# EAGLE board ZED-F9P_NEO-D9S_Combo-Panel (EAGLE 9.6.2), part 1 of 3
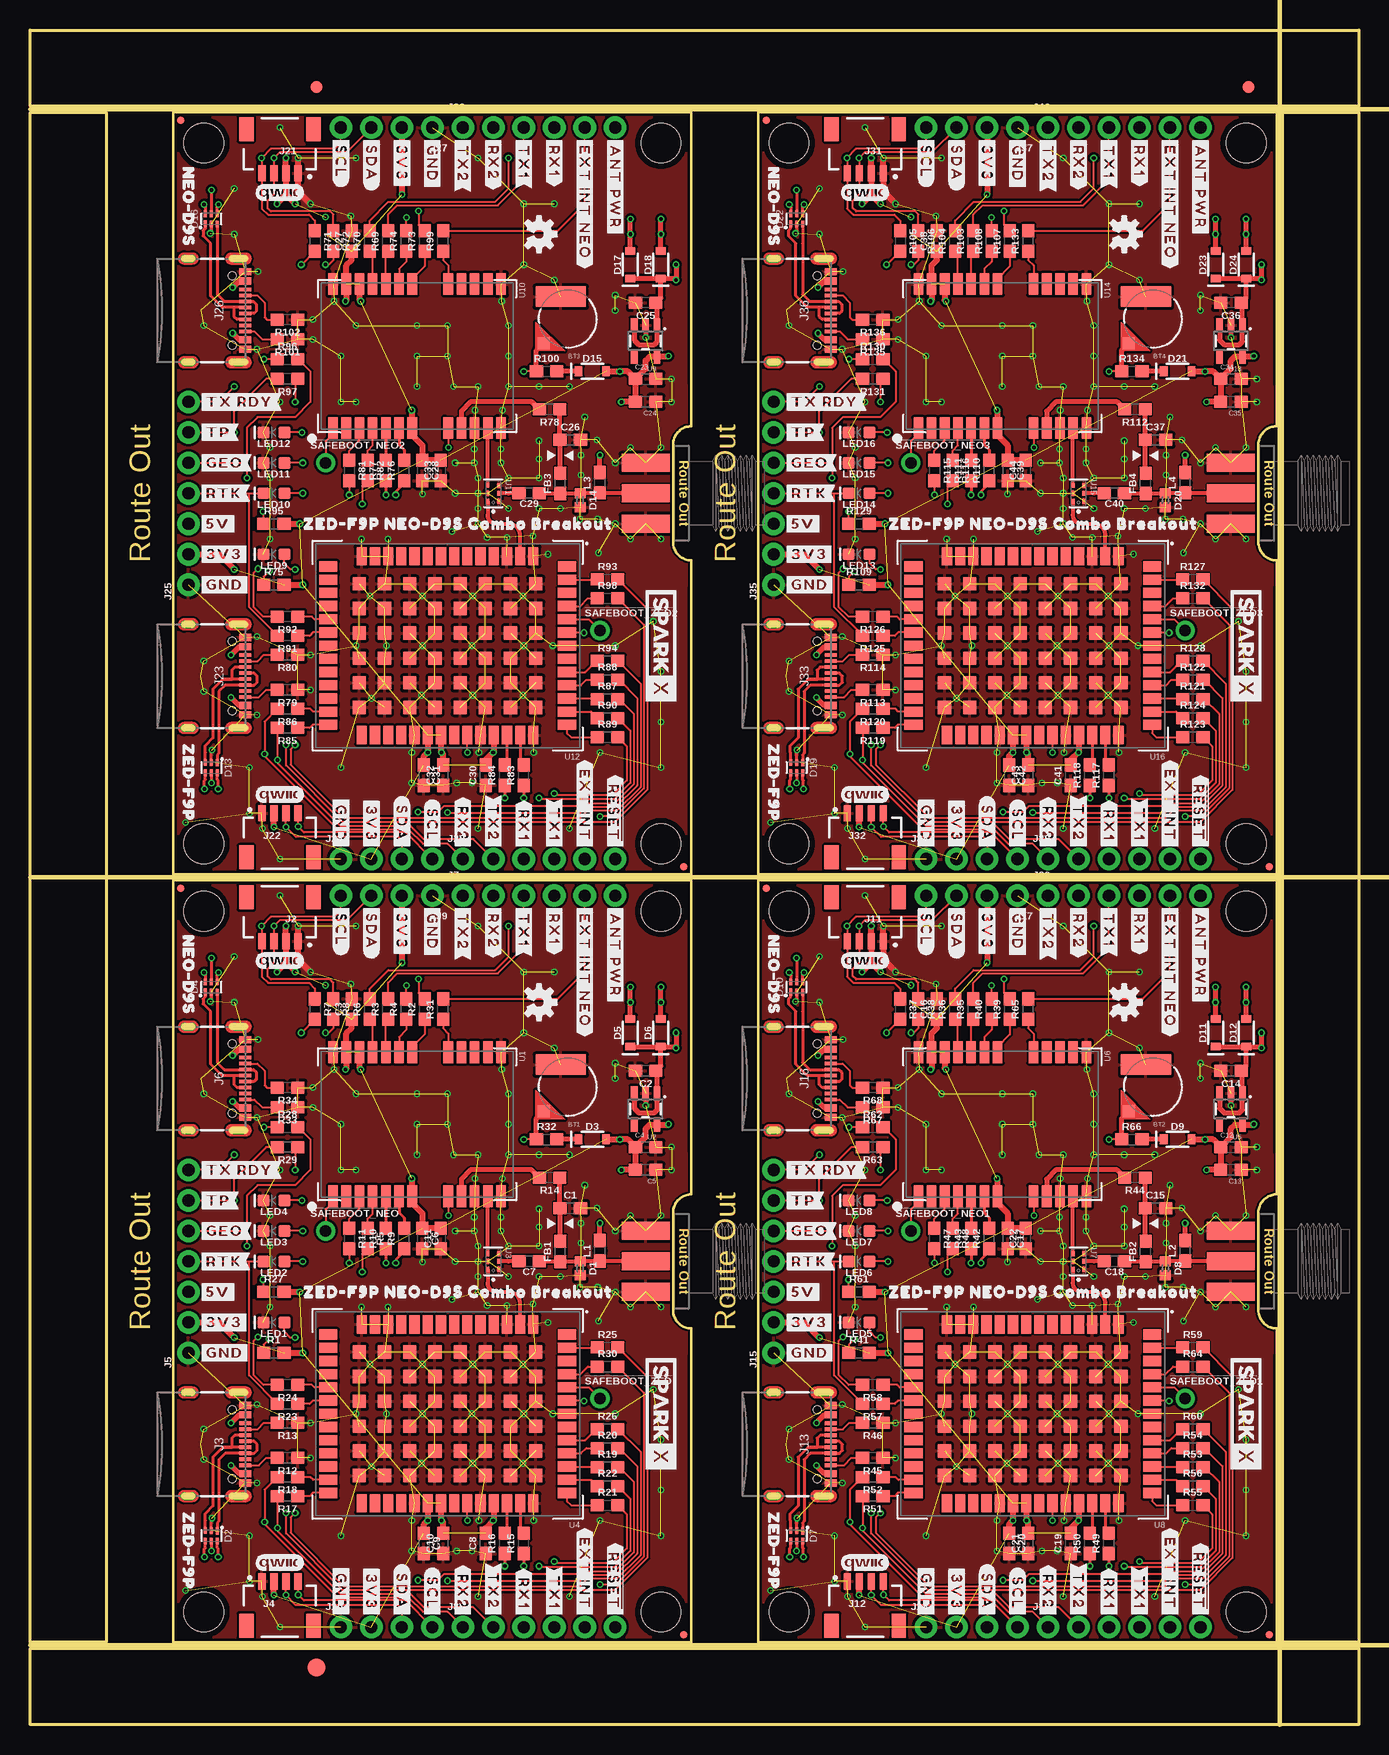
[diagram p0: board, top side]
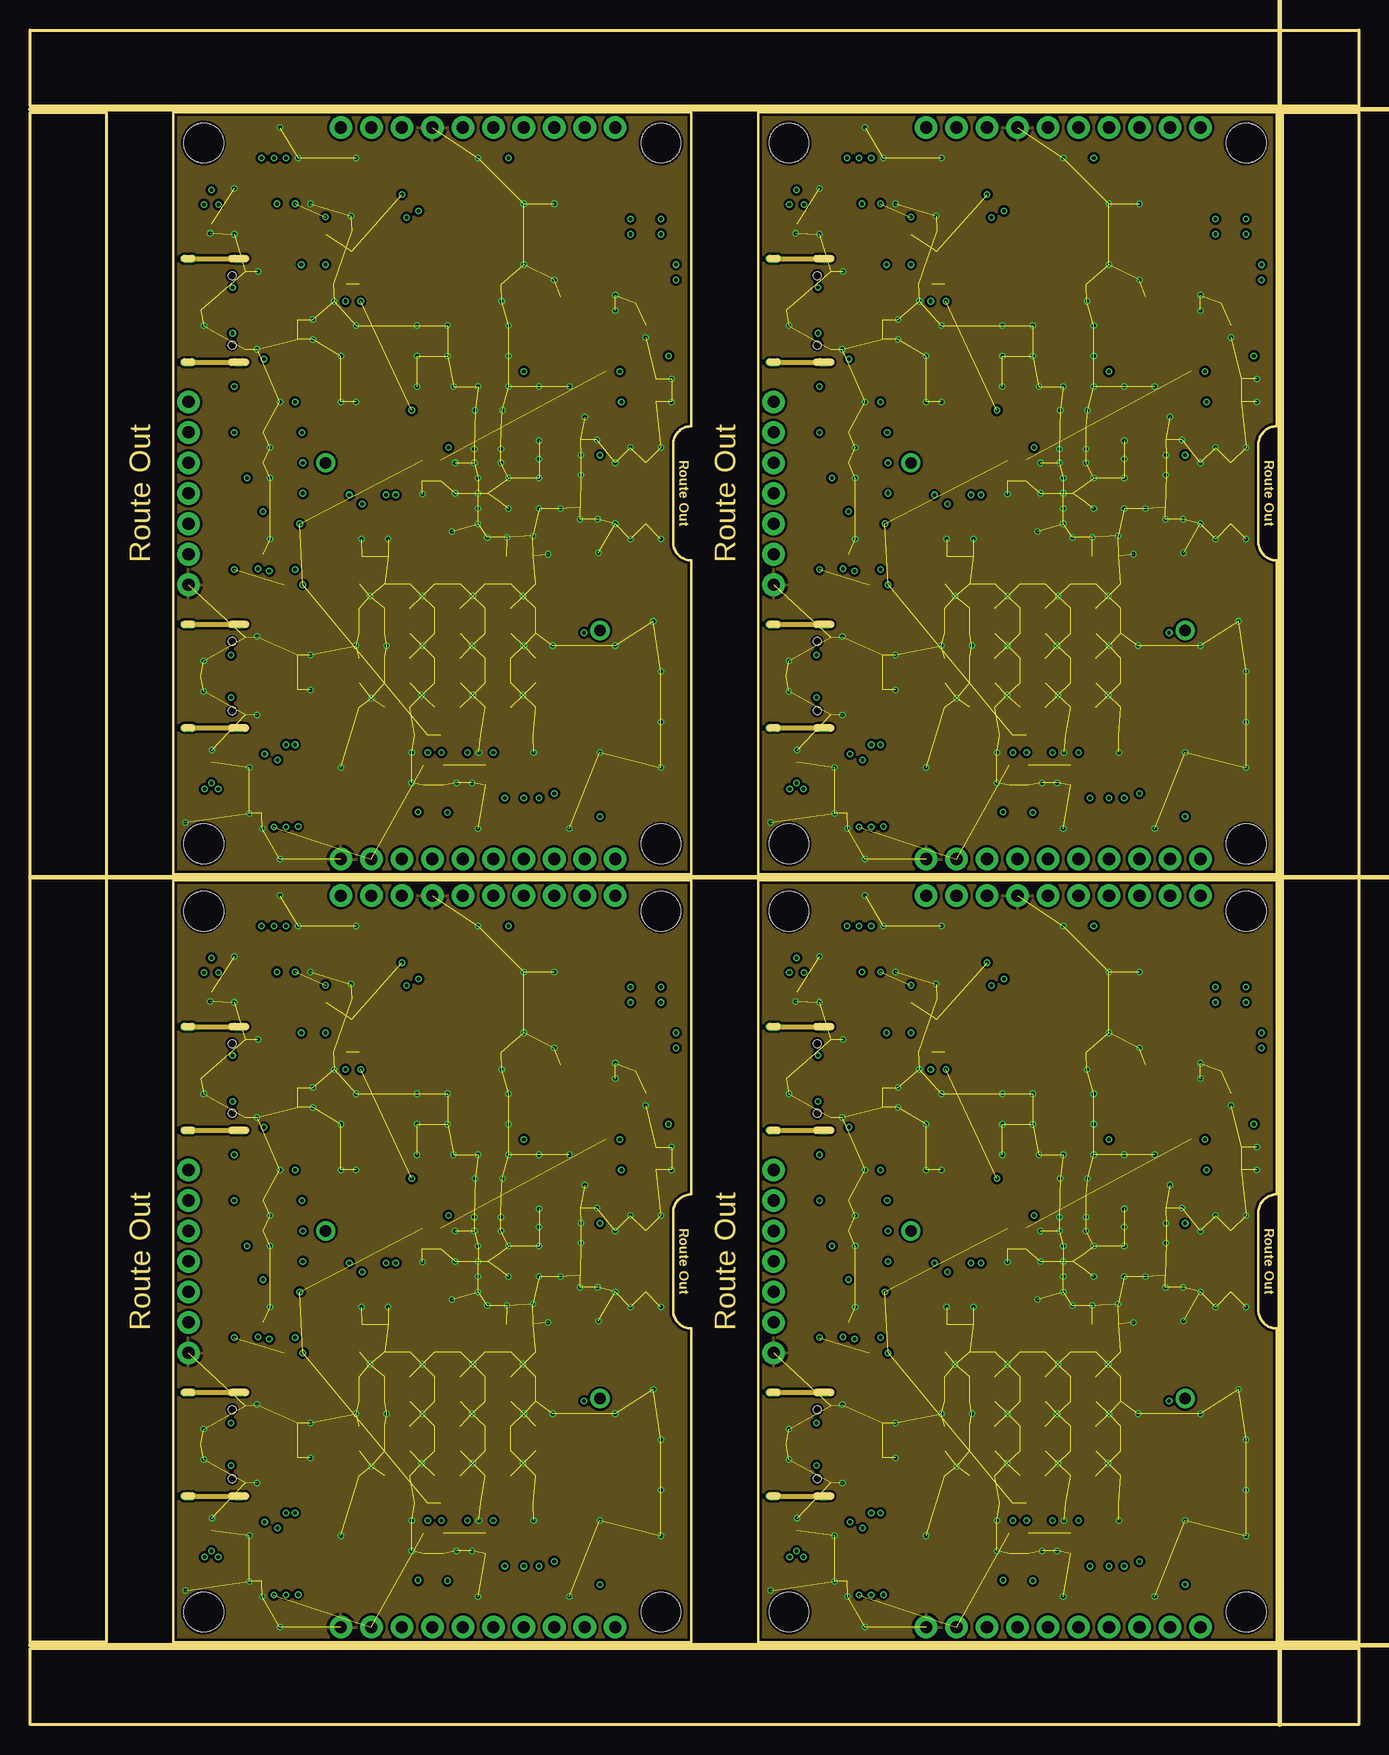
[diagram p1: board, inner layer Route2]
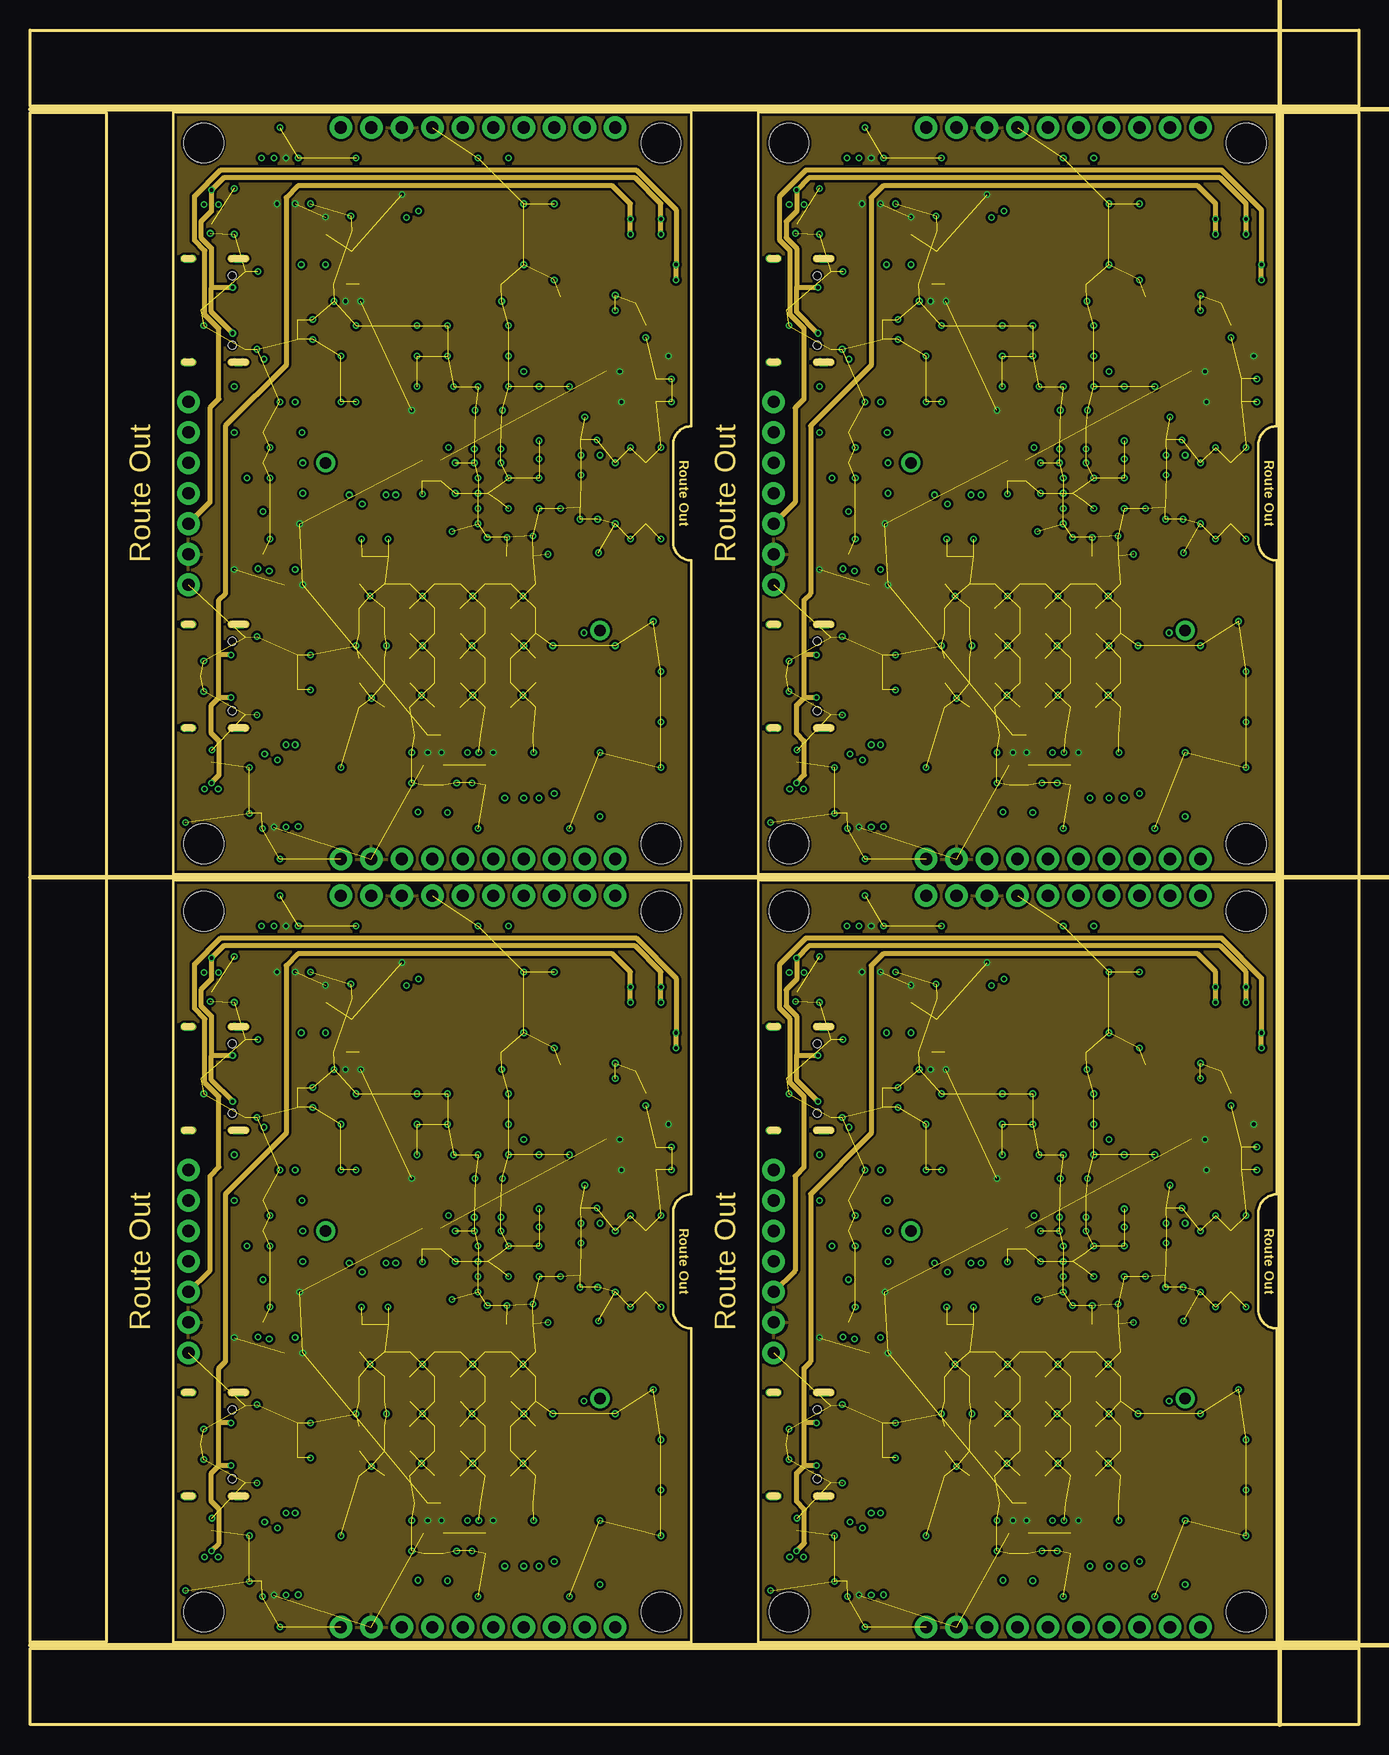
[diagram p2: board, inner layer Route15]
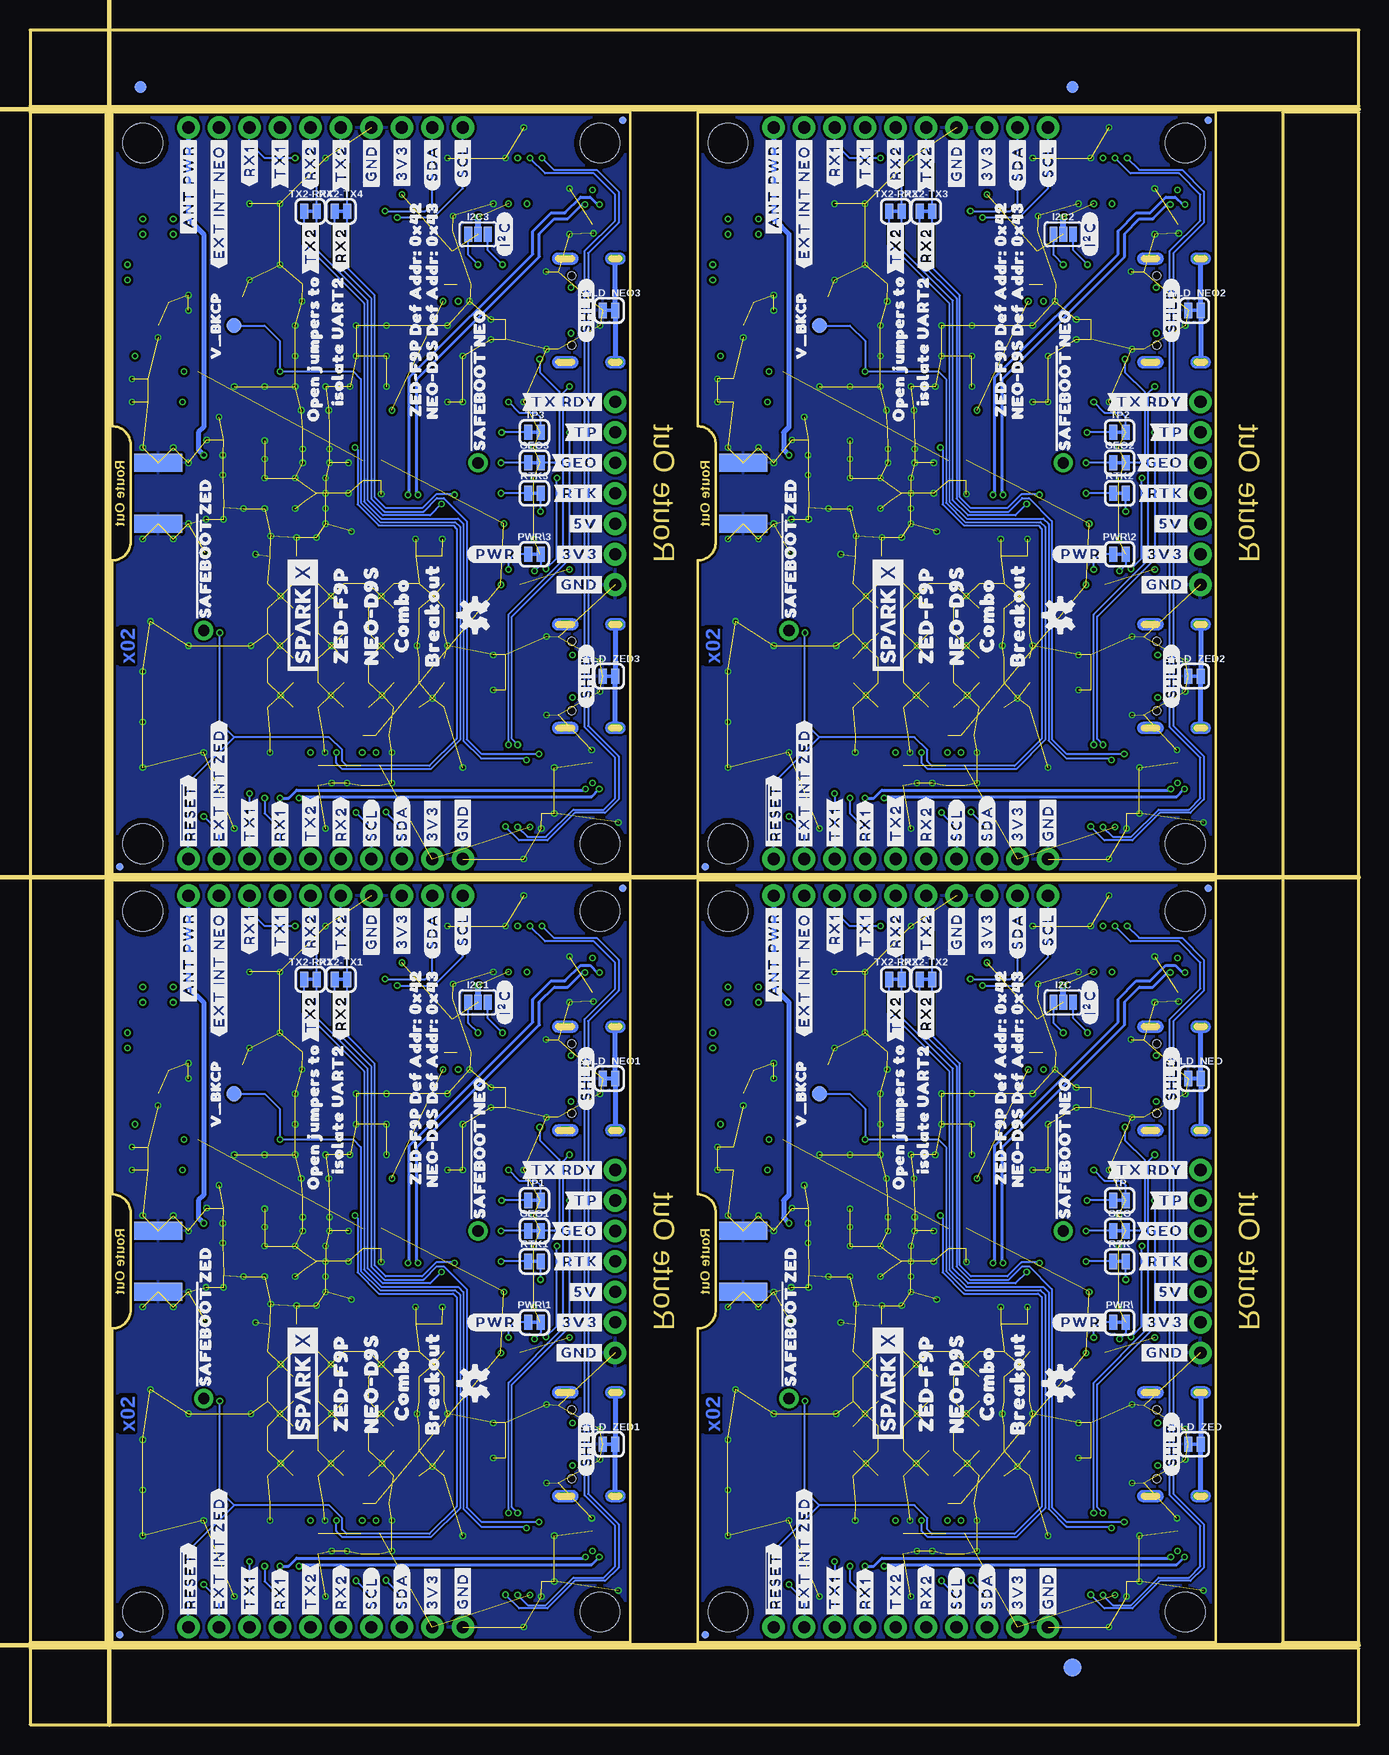
[diagram p3: board, bottom side, seen from below]

Size 110.74 x 141.22 mm. Coordinates in mm from the lower left corner, seen from the top.
Outline: 11.94,6.86 11.94,70.36 55.12,70.36 55.12,44.2 arc90 53.59,42.67 53.59,34.54 arc90 55.12,33.02 55.12,6.86 11.94,6.86
Outline: 60.71,6.86 60.71,70.36 103.89,70.36 103.89,44.2 arc90 102.36,42.67 102.36,34.54 arc90 103.89,33.02 103.89,6.86 60.71,6.86
Outline: 11.94,70.87 11.94,134.37 55.12,134.37 55.12,108.2 arc90 53.59,106.68 53.59,98.55 arc90 55.12,97.03 55.12,70.87 11.94,70.87
Outline: 60.71,70.87 60.71,134.37 103.89,134.37 103.89,108.2 arc90 102.36,106.68 102.36,98.55 arc90 103.89,97.03 103.89,70.87 60.71,70.87
Outline: 0,6.35 110.74,6.35 110.74,0 0,0 0,6.35
Outline: 104.39,134.37 110.74,134.37 110.74,6.86 104.39,6.86 104.39,134.37
Outline: 0,141.22 110.74,141.22 110.74,134.87 0,134.87 0,141.22
Outline: 0,134.37 6.35,134.37 6.35,6.86 0,6.86 0,134.37
Copper layers (1*2*15*16): Top 0.035559375mm / dielectric 0.47751875mm / Route2 0.035559375mm / dielectric 0.47751875mm / Route15 0.035559375mm / dielectric 0.47751875mm / Bottom 0.035559375mm
Design rules "ZED-F9P_NEO-D9S_Combo": minimum track width 5mil, minimum drill 0.2mm, track to track 5mil, track to pad 5mil, pad to pad 5mil, via to via 5mil, smd to smd 5mil, copper to edge 7mil, drill to drill 7mil, minimum pad ring 5mil, minimum via ring 5mil, stop-mask expansion 2.5mil, vias tented up to drill 25mil, thermal gap 10mil
Net classes: 2 3.3V: width 0.508 mm
tRestrict: 16 lines
Milling: 4 lines

## Footprints (pad centres in the part's own frame; a part is rotated, then mirrored left to right if it is on the bottom)
1X01_NO_SILK = drill 0.95 pad 1.6: 1 0,0
MS421R_IV03E = smd 1 x 1: + 2.022,2.032 | smd 4.2 x 1.7: - 0.6,-1.85
0603 = smd 1.1 x 1: 1 -0.85,0; 2 0.85,0
0402 = smd 0.85 x 0.9: 1 -0.58,0; 2 0.58,0
SOT886 = smd 0.61 x 0.25: 1 -0.405,0.5 | smd 0.56 x 0.25: 2 -0.43,0; 3 -0.43,-0.5; 4 0.43,-0.5; 5 0.43,0; 6 0.43,0.5
SOD-323 = smd 0.63 x 0.83: A 1.15,0; C -1.15,0
FIDUCIAL-1X2 = smd 1 x 1: 1 0,0
FIDUCIAL-1.5X3 = smd 1.5 x 1.5: 1 0,0
SMT-JUMPER_2_NC_TRACE_SILK = smd 0.66 x 1.27: 1 -0.521,0; 2 0.521,0
SMT-JUMPER_3_NO_SILK = smd 0.635 x 1.27: 1 -0.813,0; 2 0,0; 3 0.813,0
SMA-EDGE = smd 1.5 x 4: GND@0 -2.54,0; GND@1 2.54,0; SIG 0,0 | smd 1.5 x 4 bottom: GND@2 -2.54,0; GND@3 2.54,0
JST04_1MM_RA = smd 0.6 x 1.35: 1 -1.5,0; 2 -0.5,0; 3 0.5,0; 4 1.5,0 | smd 1.2 x 2: NC1 2.8,-3.675; NC2 -2.8,-3.675
USB-C-16P_4LAYER-PADS = smd 0.3 x 1: A5 -1.25,-0.34; A6 -0.25,-0.34; A7 0.25,-0.34; A8 1.25,-0.34; B5 1.75,-0.34; B6 0.75,-0.34; B7 -0.75,-0.34; B8 -1.75,-0.34 | smd 0.6 x 1: GND -3.225,-0.34; GND2 3.225,-0.34; VBUS1 -2.45,-0.34; VBUS2 2.45,-0.34 | drill 0.4 pad 0.6 long: SHLD1 -4.318,-0.915; SHLD2 4.318,-0.915; SHLD3 -4.318,-5.095; SHLD4 4.318,-5.095 | hole 0.65: -2.89,-1.445; 2.89,-1.445
1X07_NO_SILK = drill 1.016 pad 1.88: 1 0,0; 2 2.54,0; 3 5.08,0; 4 7.62,0; 5 10.16,0; 6 12.7,0; 7 15.24,0
1X06_NO_SILK = drill 1.016 pad 1.88: 1 0,0; 2 2.54,0; 3 5.08,0; 4 7.62,0; 5 10.16,0; 6 12.7,0
1X04_NO_SILK = drill 1.016 pad 1.88: 1 0,0; 2 2.54,0; 3 5.08,0; 4 7.62,0
STAND-OFF = hole 3.302: 0,0
MICRO-FIDUCIAL = smd 0.635 x 0.635: 1 0,0
0603_NO-CREAM = smd 1.1 x 1: 1 -0.85,0; 2 0.85,0
LED-0603 = smd 1 x 1: A -0.877,0; C 0.877,0
NEO-M9N/M8T/M8U/D9S = smd 1.8 x 0.8: 1 6,-7; 2 6,-5.9; 3 6,-4.8; 4 6,-3.7; 5 6,-2.6; 6 6,-1.5; 7 6,-0.4; 8 6,2.6; 9 6,3.7; 10 6,4.8; 11 6,5.9; 12 6,7; 13 -6,7; 14 -6,5.9; 15 -6,4.8; 16 -6,3.7; 17 -6,2.6; 18 -6,-0.4; 19 -6,-1.5; 20 -6,-2.6; 21 -6,-3.7; 22 -6,-4.8; 23 -6,-5.9; 24 -6,-7
SOT23-5 = smd 0.55 x 1.2: 1 -0.95,-1.3; 2 0,-1.3; 3 0.95,-1.3; 4 0.95,1.3; 5 -0.95,1.3
PD0922J5050S2HF_ANA = smd 0.41 x 0.33: 1 0.65,0.483; 2 0,0.483; 3 -0.65,0.483; 4 -0.65,-0.483; 5 0,-0.483; 6 0.65,-0.483
ZED-F9P = smd 0.85 x 1.52: 1 -7.15,-7.45; 2 -6.05,-7.45; 3 -4.95,-7.45; 4 -3.85,-7.45; 5 -2.75,-7.45; 6 -1.65,-7.45; 7 -0.55,-7.45; 8 0.55,-7.45; 9 1.65,-7.45; 10 2.75,-7.45; 11 3.85,-7.45; 12 4.95,-7.45; 13 6.05,-7.45; 14 7.15,-7.45; 28 7.15,7.45; 29 6.05,7.45; 30 4.95,7.45; 31 3.85,7.45; 32 2.75,7.45; 33 1.65,7.45; 34 0.55,7.45; 35 -0.55,7.45; 36 -1.65,7.45; 37 -2.75,7.45; 38 -3.85,7.45; 39 -4.95,7.45; 40 -6.05,7.45; 41 -7.15,7.45 | smd 1.52 x 0.85: 15 9.95,-6.6; 16 9.95,-5.5; 17 9.95,-4.4; 18 9.95,-3.3; 19 9.95,-2.2; 20 9.95,-1.1; 21 9.95,0; 22 9.95,1.1; 23 9.95,2.2; 24 9.95,3.3; 25 9.95,4.4; 26 9.95,5.5; 27 9.95,6.6; 42 -9.95,6.6; 43 -9.95,5.5; 44 -9.95,4.4; 45 -9.95,3.3; 46 -9.95,2.2; 47 -9.95,1.1; 48 -9.95,0; 49 -9.95,-1.1; 50 -9.95,-2.2; 51 -9.95,-3.3; 52 -9.95,-4.4; 53 -9.95,-5.5; 54 -9.95,-6.6 | smd 1.1 x 1.1: 55 -1.05,-1.05; 56 -3.15,-1.05; 57 -5.25,-1.05; 58 -7.35,-1.05; 59 -1.05,-3.1; 60 -3.15,-3.1; 61 -5.25,-3.1; 62 -7.35,-3.1; 63 -1.05,-5.15; 64 -3.15,-5.15; 65 -5.25,-5.15; 66 -7.35,-5.15; 67 -1.05,5.15; 68 -3.15,5.15; 69 -5.25,5.15; 70 -7.35,5.15; 71 -1.05,3.1; 72 -3.15,3.1; 73 -5.25,3.1; 74 -7.35,3.1; 75 -1.05,1.05; 76 -3.15,1.05; 77 -5.25,1.05; 78 -7.35,1.05; 79 1.05,1.05; 80 3.15,1.05; 81 5.25,1.05; 82 7.35,1.05; 83 1.05,3.1; 84 3.15,3.1; 85 5.25,3.1; 86 7.35,3.1; 87 1.05,5.15; 88 3.15,5.15; 89 5.25,5.15; 90 7.35,5.15; 91 1.05,-5.15; 92 3.15,-5.15; 93 5.25,-5.15; 94 7.35,-5.15; 95 1.05,-3.1; 96 3.15,-3.1; 97 5.25,-3.1; 98 7.35,-3.1; 99 1.05,-1.05; 100 3.15,-1.05; 101 5.25,-1.05; 102 7.35,-1.05
PAD.03X.05 = smd 1.27 x 1.27: 1 0,0

## Placement (x,y rotation side)
!SAFEBOOT_NEO!  TEST-POINTPOGO_PTH  [1X01_NO_SILK]  24.64,41.15 0 top
!SAFEBOOT_NEO!1  TEST-POINTPOGO_PTH  [1X01_NO_SILK]  73.41,41.15 0 top
!SAFEBOOT_NEO!2  TEST-POINTPOGO_PTH  [1X01_NO_SILK]  24.64,105.16 0 top
!SAFEBOOT_NEO!3  TEST-POINTPOGO_PTH  [1X01_NO_SILK]  73.41,105.16 0 top
!SAFEBOOT_ZED!  TEST-POINTPOGO_PTH  [1X01_NO_SILK]  47.5,27.18 0 top
!SAFEBOOT_ZED!1  TEST-POINTPOGO_PTH  [1X01_NO_SILK]  96.27,27.18 0 top
!SAFEBOOT_ZED!2  TEST-POINTPOGO_PTH  [1X01_NO_SILK]  47.5,91.19 0 top
!SAFEBOOT_ZED!3  TEST-POINTPOGO_PTH  [1X01_NO_SILK]  96.27,91.19 0 top
BT1  RELOWABLE_BATTERY_MS421R  [MS421R_IV03E]  44.83,53.15 180 top
BT2  RELOWABLE_BATTERY_MS421R  [MS421R_IV03E]  93.6,53.15 180 top
BT3  RELOWABLE_BATTERY_MS421R  [MS421R_IV03E]  44.83,117.16 180 top
BT4  RELOWABLE_BATTERY_MS421R  [MS421R_IV03E]  93.6,117.16 180 top
C1  47pF  [0603]  45.02,43.05 0 top
C2  1.0uF  [0603]  51.31,54.48 180 top
C3  1.0uF  [0603]  26.8,59.63 90 top
C4  1.0uF  [0603]  51.31,48.13 0 top
C5  0.1uF  [0603]  51.31,46.23 180 top
C6  1.0uF  [0603]  32.7,40.51 270 top
C7  47pF  [0603]  41.59,38.61 180 top
C8  1.0uF  [0603]  37.97,15.11 90 top
C9  1.0uF  [0603]  32.83,15.11 270 top
C10  0.1uF  [0603]  34.42,15.11 90 top
C11  0.1uF  [0603]  34.23,40.51 90 top
C12  1.0uF  [0603]  100.08,48.13 0 top
C13  0.1uF  [0603]  100.08,46.23 180 top
C14  1.0uF  [0603]  100.08,54.48 180 top
C15  47pF  [0603]  93.79,43.05 0 top
C16  1.0uF  [0603]  75.56,59.63 90 top
C17  1.0uF  [0603]  81.47,40.51 270 top
C18  47pF  [0603]  90.36,38.61 180 top
C19  1.0uF  [0603]  86.74,15.11 90 top
C20  1.0uF  [0603]  81.6,15.11 270 top
C21  0.1uF  [0603]  83.19,15.11 90 top
C22  0.1uF  [0603]  82.99,40.51 90 top
C23  1.0uF  [0603]  51.31,112.14 0 top
C24  0.1uF  [0603]  51.31,110.24 180 top
C25  1.0uF  [0603]  51.31,118.49 180 top
C26  47pF  [0603]  45.02,107.06 0 top
C27  1.0uF  [0603]  26.8,123.63 90 top
C28  1.0uF  [0603]  32.7,104.52 270 top
C29  47pF  [0603]  41.59,102.62 180 top
C30  1.0uF  [0603]  37.97,79.12 90 top
C31  1.0uF  [0603]  32.83,79.12 270 top
C32  0.1uF  [0603]  34.42,79.12 90 top
C33  0.1uF  [0603]  34.23,104.52 90 top
C34  1.0uF  [0603]  100.08,112.14 0 top
C35  0.1uF  [0603]  100.08,110.24 180 top
C36  1.0uF  [0603]  100.08,118.49 180 top
C37  47pF  [0603]  93.79,107.06 0 top
C38  1.0uF  [0603]  75.56,123.63 90 top
C39  1.0uF  [0603]  81.47,104.52 270 top
C40  47pF  [0603]  90.36,102.62 180 top
C41  1.0uF  [0603]  86.74,79.12 90 top
C42  1.0uF  [0603]  81.6,79.12 270 top
C43  0.1uF  [0603]  83.19,79.12 90 top
C44  0.1uF  [0603]  82.99,104.52 90 top
D1  PESD0402-0402  [0402]  45.85,38.04 270 top
D2  PRTR5V0U2F  [SOT886]  15.11,15.75 270 top
D3  0.5A/40V/420mV  [SOD-323]  46.86,48.77 0 top
D4  PRTR5V0U2F  [SOT886]  15.11,61.47 90 top
D5  1A/23V/620mV  [SOD-323]  50.04,57.66 90 top
D6  1A/23V/620mV  [SOD-323]  52.58,57.66 90 top
D7  PRTR5V0U2F  [SOT886]  63.88,15.75 270 top
D8  PESD0402-0402  [0402]  94.62,38.04 270 top
D9  0.5A/40V/420mV  [SOD-323]  95.63,48.77 0 top
D10  PRTR5V0U2F  [SOT886]  63.88,61.47 90 top
D11  1A/23V/620mV  [SOD-323]  98.81,57.66 90 top
D12  1A/23V/620mV  [SOD-323]  101.35,57.66 90 top
D13  PRTR5V0U2F  [SOT886]  15.11,79.76 270 top
D14  PESD0402-0402  [0402]  45.85,102.04 270 top
D15  0.5A/40V/420mV  [SOD-323]  46.86,112.78 0 top
D16  PRTR5V0U2F  [SOT886]  15.11,125.48 90 top
D17  1A/23V/620mV  [SOD-323]  50.04,121.67 90 top
D18  1A/23V/620mV  [SOD-323]  52.58,121.67 90 top
D19  PRTR5V0U2F  [SOT886]  63.88,79.76 270 top
D20  PESD0402-0402  [0402]  94.62,102.04 270 top
D21  0.5A/40V/420mV  [SOD-323]  95.63,112.78 0 top
D22  PRTR5V0U2F  [SOT886]  63.88,125.48 90 top
D23  1A/23V/620mV  [SOD-323]  98.81,121.67 90 top
D24  1A/23V/620mV  [SOD-323]  101.35,121.67 90 top
E$1  [FIDUCIAL-1X2]  23.88,136.46 0 top
E$2  [FIDUCIAL-1X2]  23.88,136.46 0 bottom
E$3  [FIDUCIAL-1X2]  101.54,136.46 0 top
E$4  [FIDUCIAL-1X2]  101.54,136.46 0 bottom
E$5  [FIDUCIAL-1.5X3]  23.88,4.76 0 top
E$6  [FIDUCIAL-1.5X3]  23.88,4.76 0 bottom
FB1  30Ω/1.8A  [0603]  44.2,39.43 90 top
FB2  30Ω/1.8A  [0603]  92.96,39.43 90 top
FB3  30Ω/1.8A  [0603]  44.2,103.44 90 top
FB4  30Ω/1.8A  [0603]  92.96,103.44 90 top
GEO  JUMPER-SMT_2_NC_TRACE_SILK  [SMT-JUMPER_2_NC_TRACE_SILK]  19.94,41.15 0 bottom
GEO1  JUMPER-SMT_2_NC_TRACE_SILK  [SMT-JUMPER_2_NC_TRACE_SILK]  68.71,41.15 0 bottom
GEO2  JUMPER-SMT_2_NC_TRACE_SILK  [SMT-JUMPER_2_NC_TRACE_SILK]  19.94,105.16 0 bottom
GEO3  JUMPER-SMT_2_NC_TRACE_SILK  [SMT-JUMPER_2_NC_TRACE_SILK]  68.71,105.16 0 bottom
I2C  JUMPER-SMT_3_NO_SILK  [SMT-JUMPER_3_NO_SILK]  24.64,60.2 0 bottom
I2C1  JUMPER-SMT_3_NO_SILK  [SMT-JUMPER_3_NO_SILK]  73.41,60.2 0 bottom
I2C2  JUMPER-SMT_3_NO_SILK  [SMT-JUMPER_3_NO_SILK]  24.64,124.21 0 bottom
I2C3  JUMPER-SMT_3_NO_SILK  [SMT-JUMPER_3_NO_SILK]  73.41,124.21 0 bottom
J1  ANTENNA-SMA-GROUNDEDEDGE_SMA  [SMA-EDGE]  51.31,38.61 270 top
J2  Qwiic Right Angle  [JST04_1MM_RA]  20.83,65.28 180 top
J3  USB Female Type C Connector  [USB-C-16P_4LAYER-PADS]  18.29,23.37 270 top
J4  Qwiic Right Angle  [JST04_1MM_RA]  20.83,11.94 0 top
J5  [1X07_NO_SILK]  13.21,30.99 90 top
J6  USB Female Type C Connector  [USB-C-16P_4LAYER-PADS]  18.29,53.85 270 top
J7  [1X06_NO_SILK]  36.07,69.09 0 top
J8  [1X06_NO_SILK]  36.07,8.13 0 top
J9  [1X04_NO_SILK]  33.53,69.09 180 top
J10  [1X04_NO_SILK]  25.91,8.13 0 top
J11  Qwiic Right Angle  [JST04_1MM_RA]  69.6,65.28 180 top
J12  Qwiic Right Angle  [JST04_1MM_RA]  69.6,11.94 0 top
J13  USB Female Type C Connector  [USB-C-16P_4LAYER-PADS]  67.06,23.37 270 top
J14  ANTENNA-SMA-GROUNDEDEDGE_SMA  [SMA-EDGE]  100.08,38.61 270 top
J15  [1X07_NO_SILK]  61.98,30.99 90 top
J16  USB Female Type C Connector  [USB-C-16P_4LAYER-PADS]  67.06,53.85 270 top
J17  [1X04_NO_SILK]  82.3,69.09 180 top
J18  [1X04_NO_SILK]  74.68,8.13 0 top
J19  [1X06_NO_SILK]  84.84,8.13 0 top
J20  [1X06_NO_SILK]  84.84,69.09 0 top
J21  Qwiic Right Angle  [JST04_1MM_RA]  20.83,129.29 180 top
J22  Qwiic Right Angle  [JST04_1MM_RA]  20.83,75.95 0 top
J23  USB Female Type C Connector  [USB-C-16P_4LAYER-PADS]  18.29,87.38 270 top
J24  ANTENNA-SMA-GROUNDEDEDGE_SMA  [SMA-EDGE]  51.31,102.62 270 top
J25  [1X07_NO_SILK]  13.21,95 90 top
J26  USB Female Type C Connector  [USB-C-16P_4LAYER-PADS]  18.29,117.86 270 top
J27  [1X04_NO_SILK]  33.53,133.1 180 top
J28  [1X04_NO_SILK]  25.91,72.14 0 top
J29  [1X06_NO_SILK]  36.07,72.14 0 top
J30  [1X06_NO_SILK]  36.07,133.1 0 top
J31  Qwiic Right Angle  [JST04_1MM_RA]  69.6,129.29 180 top
J32  Qwiic Right Angle  [JST04_1MM_RA]  69.6,75.95 0 top
J33  USB Female Type C Connector  [USB-C-16P_4LAYER-PADS]  67.06,87.38 270 top
J34  ANTENNA-SMA-GROUNDEDEDGE_SMA  [SMA-EDGE]  100.08,102.62 270 top
J35  [1X07_NO_SILK]  61.98,95 90 top
J36  USB Female Type C Connector  [USB-C-16P_4LAYER-PADS]  67.06,117.86 270 top
J37  [1X04_NO_SILK]  82.3,133.1 180 top
J38  [1X04_NO_SILK]  74.68,72.14 0 top
J39  [1X06_NO_SILK]  84.84,72.14 0 top
J40  [1X06_NO_SILK]  84.84,133.1 0 top
JP1  STAND-OFF  [STAND-OFF]  63.25,67.79 0 top
JP2  STAND-OFF  [STAND-OFF]  101.35,67.79 0 top
JP3  FIDUCIALUFIDUCIAL  [MICRO-FIDUCIAL]  103.25,7.49 0 top
JP4  FIDUCIALUFIDUCIAL  [MICRO-FIDUCIAL]  61.34,69.7 0 top
JP5  FIDUCIALUFIDUCIAL  [MICRO-FIDUCIAL]  103.25,7.49 0 bottom
JP6  FIDUCIALUFIDUCIAL  [MICRO-FIDUCIAL]  61.34,69.7 0 bottom
JP7  STAND-OFF  [STAND-OFF]  63.25,9.4 0 top
JP8  STAND-OFF  [STAND-OFF]  101.35,9.4 0 top
JP9  STAND-OFF  [STAND-OFF]  14.48,131.8 0 top
JP10  STAND-OFF  [STAND-OFF]  52.58,131.8 0 top
JP11  FIDUCIALUFIDUCIAL  [MICRO-FIDUCIAL]  54.48,71.5 0 top
JP12  FIDUCIALUFIDUCIAL  [MICRO-FIDUCIAL]  12.57,133.71 0 top
JP13  FIDUCIALUFIDUCIAL  [MICRO-FIDUCIAL]  54.48,71.5 0 bottom
JP14  FIDUCIALUFIDUCIAL  [MICRO-FIDUCIAL]  12.57,133.71 0 bottom
JP15  STAND-OFF  [STAND-OFF]  14.48,73.41 0 top
JP16  STAND-OFF  [STAND-OFF]  52.58,73.41 0 top
JP17  STAND-OFF  [STAND-OFF]  63.25,131.8 0 top
JP18  STAND-OFF  [STAND-OFF]  101.35,131.8 0 top
JP19  FIDUCIALUFIDUCIAL  [MICRO-FIDUCIAL]  103.25,71.5 0 top
JP20  FIDUCIALUFIDUCIAL  [MICRO-FIDUCIAL]  61.34,133.71 0 top
JP21  FIDUCIALUFIDUCIAL  [MICRO-FIDUCIAL]  54.48,7.49 0 top
JP22  FIDUCIALUFIDUCIAL  [MICRO-FIDUCIAL]  103.25,71.5 0 bottom
JP23  FIDUCIALUFIDUCIAL  [MICRO-FIDUCIAL]  61.34,133.71 0 bottom
JP24  STAND-OFF  [STAND-OFF]  63.25,73.41 0 top
JP25  STAND-OFF  [STAND-OFF]  101.35,73.41 0 top
JP31  STAND-OFF  [STAND-OFF]  14.48,67.79 0 top
JP41  STAND-OFF  [STAND-OFF]  52.58,67.79 0 top
JP61  FIDUCIALUFIDUCIAL  [MICRO-FIDUCIAL]  12.57,69.7 0 top
JP71  FIDUCIALUFIDUCIAL  [MICRO-FIDUCIAL]  54.48,7.49 0 bottom
JP81  FIDUCIALUFIDUCIAL  [MICRO-FIDUCIAL]  12.57,69.7 0 bottom
JP91  STAND-OFF  [STAND-OFF]  14.48,9.4 0 top
JP101  STAND-OFF  [STAND-OFF]  52.58,9.4 0 top
L1  DNP  [0603_NO-CREAM]  47.5,39.5 90 top
L2  DNP  [0603_NO-CREAM]  96.27,39.5 90 top
L3  DNP  [0603_NO-CREAM]  47.5,103.51 90 top
L4  DNP  [0603_NO-CREAM]  96.27,103.51 90 top
LED1  RED  [LED-0603]  20.32,33.53 180 top
LED2  BLUE  [LED-0603]  20.32,38.61 180 top
LED3  BLUE  [LED-0603]  20.32,41.15 180 top
LED4  BLUE  [LED-0603]  20.32,43.69 180 top
LED5  RED  [LED-0603]  69.09,33.53 180 top
LED6  BLUE  [LED-0603]  69.09,38.61 180 top
LED7  BLUE  [LED-0603]  69.09,41.15 180 top
LED8  BLUE  [LED-0603]  69.09,43.69 180 top
LED9  RED  [LED-0603]  20.32,97.54 180 top
LED10  BLUE  [LED-0603]  20.32,102.62 180 top
LED11  BLUE  [LED-0603]  20.32,105.16 180 top
LED12  BLUE  [LED-0603]  20.32,107.7 180 top
LED13  RED  [LED-0603]  69.09,97.54 180 top
LED14  BLUE  [LED-0603]  69.09,102.62 180 top
LED15  BLUE  [LED-0603]  69.09,105.16 180 top
LED16  BLUE  [LED-0603]  69.09,107.7 180 top
LOGO1  OSHW-LOGOS  [OSHW-LOGO-S]  42.42,60.2 270 top
LOGO2  OSHW-LOGOS  [OSHW-LOGO-S]  73.66,28.45 90 bottom
LOGO3  OSHW-LOGOS  [OSHW-LOGO-S]  91.19,60.2 270 top
LOGO4  OSHW-LOGOS  [OSHW-LOGO-S]  24.89,28.45 90 bottom
LOGO5  OSHW-LOGOS  [OSHW-LOGO-S]  24.89,92.46 90 bottom
LOGO6  OSHW-LOGOS  [OSHW-LOGO-S]  42.42,124.21 270 top
LOGO7  OSHW-LOGOS  [OSHW-LOGO-S]  73.66,92.46 90 bottom
LOGO8  OSHW-LOGOS  [OSHW-LOGO-S]  91.19,124.21 270 top
PWR\  JUMPER-SMT_2_NC_TRACE_SILK  [SMT-JUMPER_2_NC_TRACE_SILK]  19.94,33.53 0 bottom
PWR\1  JUMPER-SMT_2_NC_TRACE_SILK  [SMT-JUMPER_2_NC_TRACE_SILK]  68.71,33.53 0 bottom
PWR\2  JUMPER-SMT_2_NC_TRACE_SILK  [SMT-JUMPER_2_NC_TRACE_SILK]  19.94,97.54 0 bottom
PWR\3  JUMPER-SMT_2_NC_TRACE_SILK  [SMT-JUMPER_2_NC_TRACE_SILK]  68.71,97.54 0 bottom
R1  1k  [0603]  20.32,30.99 0 top
R2  33  [0603]  32.89,59.63 90 top
R3  33  [0603]  29.84,59.63 90 top
R4  33  [0603]  31.37,59.63 90 top
R5  33  [0603]  28.13,40.51 270 top
R6  33  [0603]  28.32,59.63 90 top
R7  2.2k  [0603]  23.75,59.63 270 top
R8  2.2k  [0603]  25.27,59.63 270 top
R9  27  [0603]  31.18,40.51 90 top
R10  27  [0603]  29.65,40.51 90 top
R11  33  [0603]  26.61,40.51 270 top
R12  5.1k  [0603]  21.46,22.23 180 top
R13  5.1k  [0603]  21.46,25.15 180 top
R14  10  [0603]  43.31,45.59 180 top
R15  27  [0603]  41.15,15.11 90 top
R16  27  [0603]  39.56,15.11 90 top
R17  33  [0603]  21.46,19.05 180 top
R18  33  [0603]  21.46,20.64 180 top
R19  33  [0603]  48.13,21.46 0 top
R20  33  [0603]  48.13,23.05 0 top
R21  33  [0603]  48.13,18.29 0 top
R22  33  [0603]  48.13,19.88 0 top
R23  33  [0603]  21.46,26.73 180 top
R24  33  [0603]  21.46,28.32 180 top
R25  33  [0603]  48.13,31.43 0 top
R26  33  [0603]  48.13,24.64 0 top
R27  1k  [0603]  20.32,36.07 0 top
R28  1k  [0603]  21.46,49.78 0 top
R29  1k  [0603]  21.46,48.13 180 top
R30  33  [0603]  48.13,29.84 0 top
R31  33  [0603]  34.42,59.63 90 top
R32  3.3k  [0603]  43.05,48.77 0 top
R33  5.1k  [0603]  21.46,51.43 180 top
R34  5.1k  [0603]  21.46,53.09 180 top
R35  33  [0603]  78.61,59.63 90 top
R36  33  [0603]  77.09,59.63 90 top
R37  2.2k  [0603]  72.52,59.63 270 top
R38  2.2k  [0603]  74.04,59.63 270 top
R39  33  [0603]  81.66,59.63 90 top
R40  33  [0603]  80.14,59.63 90 top
R41  1k  [0603]  69.09,30.99 0 top
R42  27  [0603]  79.95,40.51 90 top
R43  27  [0603]  78.42,40.51 90 top
R44  10  [0603]  92.08,45.59 180 top
R45  5.1k  [0603]  70.23,22.23 180 top
R46  5.1k  [0603]  70.23,25.15 180 top
R47  33  [0603]  75.37,40.51 270 top
R48  33  [0603]  76.9,40.51 270 top
R49  27  [0603]  89.92,15.11 90 top
R50  27  [0603]  88.33,15.11 90 top
R51  33  [0603]  70.23,19.05 180 top
R52  33  [0603]  70.23,20.64 180 top
R53  33  [0603]  96.9,21.46 0 top
R54  33  [0603]  96.9,23.05 0 top
R55  33  [0603]  96.9,18.29 0 top
R56  33  [0603]  96.9,19.88 0 top
R57  33  [0603]  70.23,26.73 180 top
R58  33  [0603]  70.23,28.32 180 top
R59  33  [0603]  96.9,31.43 0 top
R60  33  [0603]  96.9,24.64 0 top
R61  1k  [0603]  69.09,36.07 0 top
R62  1k  [0603]  70.23,49.78 0 top
R63  1k  [0603]  70.23,48.13 180 top
R64  33  [0603]  96.9,29.84 0 top
R65  33  [0603]  83.19,59.63 90 top
R66  3.3k  [0603]  91.82,48.77 0 top
R67  5.1k  [0603]  70.23,51.43 180 top
R68  5.1k  [0603]  70.23,53.09 180 top
R69  33  [0603]  29.84,123.63 90 top
R70  33  [0603]  28.32,123.63 90 top
R71  2.2k  [0603]  23.75,123.63 270 top
R72  2.2k  [0603]  25.27,123.63 270 top
R73  33  [0603]  32.89,123.63 90 top
R74  33  [0603]  31.37,123.63 90 top
R75  1k  [0603]  20.32,95 0 top
R76  27  [0603]  31.18,104.52 90 top
R77  27  [0603]  29.65,104.52 90 top
R78  10  [0603]  43.31,109.6 180 top
R79  5.1k  [0603]  21.46,86.23 180 top
R80  5.1k  [0603]  21.46,89.15 180 top
R81  33  [0603]  26.61,104.52 270 top
R82  33  [0603]  28.13,104.52 270 top
R83  27  [0603]  41.15,79.12 90 top
R84  27  [0603]  39.56,79.12 90 top
R85  33  [0603]  21.46,83.06 180 top
R86  33  [0603]  21.46,84.65 180 top
R87  33  [0603]  48.13,85.47 0 top
R88  33  [0603]  48.13,87.06 0 top
R89  33  [0603]  48.13,82.3 0 top
R90  33  [0603]  48.13,83.88 0 top
R91  33  [0603]  21.46,90.74 180 top
R92  33  [0603]  21.46,92.33 180 top
R93  33  [0603]  48.13,95.44 0 top
R94  33  [0603]  48.13,88.65 0 top
R95  1k  [0603]  20.32,100.08 0 top
R96  1k  [0603]  21.46,113.79 0 top
R97  1k  [0603]  21.46,112.14 180 top
R98  33  [0603]  48.13,93.85 0 top
R99  33  [0603]  34.42,123.63 90 top
R100  3.3k  [0603]  43.05,112.78 0 top
R101  5.1k  [0603]  21.46,115.44 180 top
R102  5.1k  [0603]  21.46,117.09 180 top
R103  33  [0603]  78.61,123.63 90 top
R104  33  [0603]  77.09,123.63 90 top
R105  2.2k  [0603]  72.52,123.63 270 top
R106  2.2k  [0603]  74.04,123.63 270 top
R107  33  [0603]  81.66,123.63 90 top
R108  33  [0603]  80.14,123.63 90 top
R109  1k  [0603]  69.09,95 0 top
R110  27  [0603]  79.95,104.52 90 top
R111  27  [0603]  78.42,104.52 90 top
R112  10  [0603]  92.08,109.6 180 top
R113  5.1k  [0603]  70.23,86.23 180 top
R114  5.1k  [0603]  70.23,89.15 180 top
R115  33  [0603]  75.37,104.52 270 top
R116  33  [0603]  76.9,104.52 270 top
R117  27  [0603]  89.92,79.12 90 top
R118  27  [0603]  88.33,79.12 90 top
R119  33  [0603]  70.23,83.06 180 top
R120  33  [0603]  70.23,84.65 180 top
R121  33  [0603]  96.9,85.47 0 top
R122  33  [0603]  96.9,87.06 0 top
R123  33  [0603]  96.9,82.3 0 top
R124  33  [0603]  96.9,83.88 0 top
R125  33  [0603]  70.23,90.74 180 top
R126  33  [0603]  70.23,92.33 180 top
R127  33  [0603]  96.9,95.44 0 top
R128  33  [0603]  96.9,88.65 0 top
R129  1k  [0603]  69.09,100.08 0 top
R130  1k  [0603]  70.23,113.79 0 top
R131  1k  [0603]  70.23,112.14 180 top
R132  33  [0603]  96.9,93.85 0 top
R133  33  [0603]  83.19,123.63 90 top
R134  3.3k  [0603]  91.82,112.78 0 top
R135  5.1k  [0603]  70.23,115.44 180 top
R136  5.1k  [0603]  70.23,117.09 180 top
RTK  JUMPER-SMT_2_NC_TRACE_SILK  [SMT-JUMPER_2_NC_TRACE_SILK]  19.94,38.61 0 bottom
RTK1  JUMPER-SMT_2_NC_TRACE_SILK  [SMT-JUMPER_2_NC_TRACE_SILK]  68.71,38.61 0 bottom
RTK2  JUMPER-SMT_2_NC_TRACE_SILK  [SMT-JUMPER_2_NC_TRACE_SILK]  19.94,102.62 0 bottom
RTK3  JUMPER-SMT_2_NC_TRACE_SILK  [SMT-JUMPER_2_NC_TRACE_SILK]  68.71,102.62 0 bottom
RX2-TX1  JUMPER-SMT_2_NC_TRACE_SILK  [SMT-JUMPER_2_NC_TRACE_SILK]  84.84,62.1 0 bottom
RX2-TX2  JUMPER-SMT_2_NC_TRACE_SILK  [SMT-JUMPER_2_NC_TRACE_SILK]  36.07,62.1 0 bottom
RX2-TX3  JUMPER-SMT_2_NC_TRACE_SILK  [SMT-JUMPER_2_NC_TRACE_SILK]  36.07,126.11 0 bottom
RX2-TX4  JUMPER-SMT_2_NC_TRACE_SILK  [SMT-JUMPER_2_NC_TRACE_SILK]  84.84,126.11 0 bottom
SHLD_NEO  JUMPER-SMT_2_NC_TRACE_SILK  [SMT-JUMPER_2_NC_TRACE_SILK]  13.72,53.85 0 bottom
SHLD_NEO1  JUMPER-SMT_2_NC_TRACE_SILK  [SMT-JUMPER_2_NC_TRACE_SILK]  62.48,53.85 0 bottom
SHLD_NEO2  JUMPER-SMT_2_NC_TRACE_SILK  [SMT-JUMPER_2_NC_TRACE_SILK]  13.72,117.86 0 bottom
SHLD_NEO3  JUMPER-SMT_2_NC_TRACE_SILK  [SMT-JUMPER_2_NC_TRACE_SILK]  62.48,117.86 0 bottom
SHLD_ZED  JUMPER-SMT_2_NC_TRACE_SILK  [SMT-JUMPER_2_NC_TRACE_SILK]  13.72,23.37 0 bottom
SHLD_ZED1  JUMPER-SMT_2_NC_TRACE_SILK  [SMT-JUMPER_2_NC_TRACE_SILK]  62.48,23.37 0 bottom
SHLD_ZED2  JUMPER-SMT_2_NC_TRACE_SILK  [SMT-JUMPER_2_NC_TRACE_SILK]  13.72,87.38 0 bottom
SHLD_ZED3  JUMPER-SMT_2_NC_TRACE_SILK  [SMT-JUMPER_2_NC_TRACE_SILK]  62.48,87.38 0 bottom
TP  JUMPER-SMT_2_NC_TRACE_SILK  [SMT-JUMPER_2_NC_TRACE_SILK]  19.94,43.69 0 bottom
TP1  JUMPER-SMT_2_NC_TRACE_SILK  [SMT-JUMPER_2_NC_TRACE_SILK]  68.71,43.69 0 bottom
TP2  JUMPER-SMT_2_NC_TRACE_SILK  [SMT-JUMPER_2_NC_TRACE_SILK]  19.94,107.7 0 bottom
TP3  JUMPER-SMT_2_NC_TRACE_SILK  [SMT-JUMPER_2_NC_TRACE_SILK]  68.71,107.7 0 bottom
TX2-RX1  JUMPER-SMT_2_NC_TRACE_SILK  [SMT-JUMPER_2_NC_TRACE_SILK]  87.38,62.1 0 bottom
TX2-RX2  JUMPER-SMT_2_NC_TRACE_SILK  [SMT-JUMPER_2_NC_TRACE_SILK]  38.61,62.1 0 bottom
TX2-RX3  JUMPER-SMT_2_NC_TRACE_SILK  [SMT-JUMPER_2_NC_TRACE_SILK]  38.61,126.11 0 bottom
TX2-RX4  JUMPER-SMT_2_NC_TRACE_SILK  [SMT-JUMPER_2_NC_TRACE_SILK]  87.38,126.11 0 bottom
U1  U-BLOX_NEO-D9S-00B  [NEO-M9N/M8T/M8U/D9S]  32.26,50.04 270 top
U2  3.3V  [SOT23-5]  51.31,51.31 180 top
U3  POWER-DIVIDER  [PD0922J5050S2HF_ANA]  38.61,38.61 270 top
U4  U-BLOX_ZED-F9P  [ZED-F9P]  34.8,25.91 180 top
U5  3.3V  [SOT23-5]  100.08,51.31 180 top
U6  U-BLOX_NEO-D9S-00B  [NEO-M9N/M8T/M8U/D9S]  81.03,50.04 270 top
U7  POWER-DIVIDER  [PD0922J5050S2HF_ANA]  87.38,38.61 270 top
U8  U-BLOX_ZED-F9P  [ZED-F9P]  83.57,25.91 180 top
U9  3.3V  [SOT23-5]  51.31,115.32 180 top
U10  U-BLOX_NEO-D9S-00B  [NEO-M9N/M8T/M8U/D9S]  32.26,114.05 270 top
U11  POWER-DIVIDER  [PD0922J5050S2HF_ANA]  38.61,102.62 270 top
U12  U-BLOX_ZED-F9P  [ZED-F9P]  34.8,89.92 180 top
U13  3.3V  [SOT23-5]  100.08,115.32 180 top
U14  U-BLOX_NEO-D9S-00B  [NEO-M9N/M8T/M8U/D9S]  81.03,114.05 270 top
U15  POWER-DIVIDER  [PD0922J5050S2HF_ANA]  87.38,102.62 270 top
U16  U-BLOX_ZED-F9P  [ZED-F9P]  83.57,89.92 180 top
U$1  [#GND#0]  33.53,68.33 270 top
U$2  [#GND#0]  13.97,30.99 0 top
U$3  [#GND#0]  25.91,8.89 90 bottom
U$4  [#GND#1]  25.91,8.89 270 top
U$5  [#GND#1]  13.97,30.99 0 bottom
U$6  [#GND#1]  33.53,68.33 90 bottom
U$7  [#SHLD#0]  15.62,53.85 90 bottom
U$8  [#SDA#0]  28.45,68.33 270 top
U$9  [#SCL#0]  33.53,8.89 90 bottom
U$10  [#SDA#0]  30.99,8.89 90 bottom
U$11  [#SDA#1]  30.99,8.89 270 top
U$12  [#SDA#1]  28.45,68.33 90 bottom
U$13  [#SCL#0]  25.91,68.33 270 top
U$14  [QWIIC_4MM]  20.83,13.49 0 top
U$15  [#SCL#1]  25.91,68.33 90 bottom
U$16  [#RTK#0]  13.97,38.61 0 top
U$17  [#RTK#1]  13.97,38.61 0 bottom
U$18  [#GEO#0]  13.97,41.15 0 top
U$19  [#GEO#1]  13.97,41.15 0 bottom
U$20  [#5V#0]  13.97,36.07 0 top
U$21  [#5V#6]  13.97,36.07 0 bottom
U$22  [#3V3#0]  30.99,68.33 270 top
U$23  [#3V3#0]  28.45,8.89 90 bottom
U$24  [#3V3#4]  30.99,68.33 90 bottom
U$25  [#3V3#4]  28.45,8.89 270 top
U$26  [#TP#0]  13.97,43.69 0 top
U$27  [#TP#1]  13.97,43.69 0 bottom
U$28  [#TX_RDY#0]  13.97,46.23 0 top
U$29  [#TX_RDY#1]  13.97,46.23 0 bottom
U$30  [#SCL#1]  33.53,8.89 270 top
U$31  [#TX2#0]  38.61,61.47 90 bottom
U$32  [#RX2#0]  36.07,61.47 90 bottom
U$33  [OPEN_JUMPERS_TO0]  38.35,50.67 90 bottom
U$34  [#RX2#0]  36.07,8.89 270 top
U$35  [#RX2#0]  38.61,68.33 90 bottom
U$36  [#RX2#3]  38.61,68.33 270 top
U$37  [#RX2#3]  36.07,8.89 90 bottom
U$38  [QWIIC_4MM]  20.83,63.65 0 top
U$39  [#TX2#0]  38.61,8.89 270 top
U$40  [#TX2#0]  36.07,68.33 90 bottom
U$41  [#TX2#3]  36.07,68.33 270 top
U$42  [#TX2#3]  38.61,8.89 90 bottom
U$43  [#RX1#0]  41.15,8.89 270 top
U$44  [#RX1#0]  43.69,68.33 90 bottom
U$45  [##RESET##0]  48.77,8.89 270 top
U$46  [##RESET##1]  48.77,8.89 90 bottom
U$47  [#EXT_INT#0]  46.23,8.89 270 top
U$48  [#EXT_INT_ZED#0]  46.23,8.89 90 bottom
U$49  [#RX1#2]  43.69,68.33 270 top
U$50  [#RX1#2]  41.15,8.89 90 bottom
U$51  [#TX1#0]  43.69,8.89 270 top
U$52  [#I�C#0]  22.42,60.2 90 bottom
U$53  [#SHLD#0]  15.62,23.37 90 bottom
U$54  [ISOLATE_UART21]  36.32,51.31 90 bottom
U$55  [NEO#D9S0]  33.53,28.45 90 bottom
U$56  [#3V3#0]  13.97,33.53 0 top
U$57  [#TX1#0]  41.15,68.33 90 bottom
U$58  [#ANT_PWR#0]  48.77,68.33 90 bottom
U$59  [#ANT_PWR#1]  48.77,68.33 270 top
U$60  [#TX1#2]  41.15,68.33 270 top
U$61  [#TX1#2]  43.69,8.89 90 bottom
U$62  [#EXT_INT_NEO#0]  46.23,68.33 270 top
U$63  [#EXT_INT_NEO#1]  46.23,68.33 90 bottom
U$64  [ZED#F9P0]  36.07,28.45 90 bottom
U$65  [ZED#F9P10]  13.21,14.48 270 top
U$66  [NEO#D9S10]  13.21,62.48 270 top
U$67  [COMBO10]  30.99,28.45 90 bottom
U$68  [BREAKOUT11]  28.45,28.45 90 bottom
U$69  [#PWR#0]  20.83,33.53 0 bottom
U$70  [#3V3#4]  13.97,33.53 0 bottom
U$71  [#SAFEBOOT#_NEO0]  24.64,41.53 90 bottom
U$72  [#SAFEBOOT#_ZED0]  47.5,27.56 90 bottom
U$73  [NEO#D9S_DEF_ADDR#_0X4310]  28.45,53.85 90 bottom
U$74  [ZED#F9P_DEF_ADDR#_0X420]  29.84,53.97 90 bottom
U$75  [ZED#F9P_NEO#D9S_COMBO_BREAKOUT0]  35.69,36.07 0 top
U$76  [V_BKCP0]  46.48,52.58 90 bottom
U$77  SPARKX-LOGO4  [SPARKX-MEDIUM]  52.58,25.91 270 top
U$78  SPARKX-LOGO4  [SPARKX-MEDIUM]  39.24,28.45 90 bottom
U$79  [QWIIC_4MM]  69.6,13.49 0 top
U$80  [#GND#0]  82.3,68.33 270 top
U$81  [#GND#0]  62.74,30.99 0 top
U$82  [#GND#0]  74.68,8.89 90 bottom
U$83  [#GND#1]  74.68,8.89 270 top
U$84  [#GND#1]  62.74,30.99 0 bottom
U$85  [#GND#1]  82.3,68.33 90 bottom
U$86  [#5V#0]  62.74,36.07 0 top
U$87  [#5V#6]  62.74,36.07 0 bottom
U$88  [#3V3#0]  79.76,68.33 270 top
U$89  [#3V3#0]  77.22,8.89 90 bottom
U$90  [#3V3#4]  79.76,68.33 90 bottom
U$91  [#3V3#4]  77.22,8.89 270 top
U$92  [##RESET##0]  97.54,8.89 270 top
U$93  [##RESET##1]  97.54,8.89 90 bottom
U$94  [#EXT_INT#0]  95,8.89 270 top
U$95  [#I�C#0]  71.18,60.2 90 bottom
U$96  [#SHLD#0]  64.39,23.37 90 bottom
U$97  [QWIIC_4MM]  69.6,63.65 0 top
U$98  [#3V3#0]  62.74,33.53 0 top
U$99  [#ANT_PWR#0]  97.54,68.33 90 bottom
U$100  [#ANT_PWR#1]  97.54,68.33 270 top
U$101  [#RTK#0]  62.74,38.61 0 top
U$102  [#RTK#1]  62.74,38.61 0 bottom
U$103  [#GEO#0]  62.74,41.15 0 top
U$104  [#GEO#1]  62.74,41.15 0 bottom
U$105  [#TP#0]  62.74,43.69 0 top
U$106  [#TP#1]  62.74,43.69 0 bottom
U$107  [#TX_RDY#0]  62.74,46.23 0 top
U$108  [#TX_RDY#1]  62.74,46.23 0 bottom
U$109  [#RX2#0]  84.84,8.89 270 top
U$110  [#RX2#0]  87.38,68.33 90 bottom
U$111  [#RX2#3]  87.38,68.33 270 top
U$112  [#RX2#3]  84.84,8.89 90 bottom
U$113  [#TX2#0]  87.38,8.89 270 top
U$114  [#TX2#0]  84.84,68.33 90 bottom
U$115  [#TX2#3]  84.84,68.33 270 top
U$116  [#TX2#3]  87.38,8.89 90 bottom
U$117  [#RX1#0]  89.92,8.89 270 top
U$118  [#RX1#0]  92.46,68.33 90 bottom
U$119  [#RX1#2]  92.46,68.33 270 top
U$120  [#RX1#2]  89.92,8.89 90 bottom
U$121  [#TX1#0]  92.46,8.89 270 top
U$122  [#TX1#0]  89.92,68.33 90 bottom
U$123  [#TX1#2]  89.92,68.33 270 top
U$124  [#TX1#2]  92.46,8.89 90 bottom
U$125  [#EXT_INT_NEO#0]  95,68.33 270 top
U$126  [#EXT_INT_NEO#1]  95,68.33 90 bottom
U$127  [#SHLD#0]  64.39,53.85 90 bottom
U$128  [#SDA#0]  77.22,68.33 270 top
U$129  [#SDA#0]  79.76,8.89 90 bottom
U$130  [#SDA#1]  79.76,8.89 270 top
U$131  [#SDA#1]  77.22,68.33 90 bottom
U$132  [#SCL#0]  82.3,8.89 90 bottom
U$133  [#SCL#0]  74.68,68.33 270 top
U$134  [#SCL#1]  74.68,68.33 90 bottom
U$135  [#SCL#1]  82.3,8.89 270 top
U$136  [#TX2#0]  87.38,61.47 90 bottom
U$137  [#RX2#0]  84.84,61.47 90 bottom
U$138  [ZED#F9P0]  84.84,28.45 90 bottom
U$139  [ZED#F9P10]  61.98,14.48 270 top
U$140  [NEO#D9S0]  82.3,28.45 90 bottom
U$141  [NEO#D9S10]  61.98,62.48 270 top
U$142  [COMBO10]  79.76,28.45 90 bottom
U$143  [BREAKOUT11]  77.22,28.45 90 bottom
U$144  [OPEN_JUMPERS_TO0]  87.12,50.67 90 bottom
U$145  [ISOLATE_UART21]  85.09,51.31 90 bottom
U$146  [#PWR#0]  69.6,33.53 0 bottom
U$147  [#3V3#4]  62.74,33.53 0 bottom
U$148  [#SAFEBOOT#_NEO0]  73.41,41.53 90 bottom
U$149  [#SAFEBOOT#_ZED0]  96.27,27.56 90 bottom
U$150  [NEO#D9S_DEF_ADDR#_0X4310]  77.22,53.85 90 bottom
U$151  [ZED#F9P_DEF_ADDR#_0X420]  78.61,53.97 90 bottom
U$152  [#EXT_INT_ZED#0]  95,8.89 90 bottom
U$153  [ZED#F9P_NEO#D9S_COMBO_BREAKOUT0]  84.45,36.07 0 top
U$154  [V_BKCP0]  95.25,52.58 90 bottom
U$155  SPARKX-LOGO4  [SPARKX-MEDIUM]  101.35,25.91 270 top
U$156  SPARKX-LOGO4  [SPARKX-MEDIUM]  88.01,28.45 90 bottom
U$157  [QWIIC_4MM]  20.83,77.5 0 top
U$158  [#GND#0]  33.53,132.33 270 top
U$159  [#GND#0]  13.97,95 0 top
U$160  [#GND#0]  25.91,72.9 90 bottom
U$161  [#GND#1]  25.91,72.9 270 top
U$162  [#GND#1]  13.97,95 0 bottom
U$163  [#GND#1]  33.53,132.33 90 bottom
U$164  [#5V#0]  13.97,100.08 0 top
U$165  [#5V#6]  13.97,100.08 0 bottom
U$166  [#3V3#0]  30.99,132.33 270 top
U$167  [#3V3#0]  28.45,72.9 90 bottom
U$168  [#3V3#4]  30.99,132.33 90 bottom
U$169  [#3V3#4]  28.45,72.9 270 top
U$170  [##RESET##0]  48.77,72.9 270 top
U$171  [##RESET##1]  48.77,72.9 90 bottom
U$172  [#EXT_INT#0]  46.23,72.9 270 top
U$173  [#I�C#0]  22.42,124.21 90 bottom
U$174  [#SHLD#0]  15.62,87.38 90 bottom
U$175  [QWIIC_4MM]  20.83,127.66 0 top
U$176  [#3V3#0]  13.97,97.54 0 top
U$177  [#ANT_PWR#0]  48.77,132.33 90 bottom
U$178  [#ANT_PWR#1]  48.77,132.33 270 top
U$179  [#RTK#0]  13.97,102.62 0 top
U$180  [#RTK#1]  13.97,102.62 0 bottom
U$181  [#GEO#0]  13.97,105.16 0 top
U$182  [#GEO#1]  13.97,105.16 0 bottom
U$183  [#TP#0]  13.97,107.7 0 top
U$184  [#TP#1]  13.97,107.7 0 bottom
U$185  [#TX_RDY#0]  13.97,110.24 0 top
U$186  [#TX_RDY#1]  13.97,110.24 0 bottom
U$187  [#RX2#0]  36.07,72.9 270 top
U$188  [#RX2#0]  38.61,132.33 90 bottom
U$189  [#RX2#3]  38.61,132.33 270 top
U$190  [#RX2#3]  36.07,72.9 90 bottom
U$191  [#TX2#0]  38.61,72.9 270 top
U$192  [#TX2#0]  36.07,132.33 90 bottom
U$193  [#TX2#3]  36.07,132.33 270 top
U$194  [#TX2#3]  38.61,72.9 90 bottom
U$195  [#RX1#0]  41.15,72.9 270 top
U$196  [#RX1#0]  43.69,132.33 90 bottom
U$197  [#RX1#2]  43.69,132.33 270 top
U$198  [#RX1#2]  41.15,72.9 90 bottom
U$199  [#TX1#0]  43.69,72.9 270 top
U$200  [#TX1#0]  41.15,132.33 90 bottom
U$201  [#TX1#2]  41.15,132.33 270 top
U$202  [#TX1#2]  43.69,72.9 90 bottom
U$203  [#EXT_INT_NEO#0]  46.23,132.33 270 top
U$204  [#EXT_INT_NEO#1]  46.23,132.33 90 bottom
U$205  [#SHLD#0]  15.62,117.86 90 bottom
U$206  [#SDA#0]  28.45,132.33 270 top
U$207  [#SDA#0]  30.99,72.9 90 bottom
U$208  [#SDA#1]  30.99,72.9 270 top
U$209  [#SDA#1]  28.45,132.33 90 bottom
U$210  [#SCL#0]  33.53,72.9 90 bottom
U$211  [#SCL#0]  25.91,132.33 270 top
U$212  [#SCL#1]  25.91,132.33 90 bottom
U$213  [#SCL#1]  33.53,72.9 270 top
U$214  [#TX2#0]  38.61,125.48 90 bottom
U$215  [#RX2#0]  36.07,125.48 90 bottom
U$216  [ZED#F9P0]  36.07,92.46 90 bottom
U$217  [ZED#F9P10]  13.21,78.49 270 top
U$218  [NEO#D9S0]  33.53,92.46 90 bottom
U$219  [NEO#D9S10]  13.21,126.49 270 top
U$220  [COMBO10]  30.99,92.46 90 bottom
U$221  [BREAKOUT11]  28.45,92.46 90 bottom
U$222  [OPEN_JUMPERS_TO0]  38.35,114.68 90 bottom
U$223  [ISOLATE_UART21]  36.32,115.32 90 bottom
U$224  [#PWR#0]  20.83,97.54 0 bottom
U$225  [#3V3#4]  13.97,97.54 0 bottom
U$226  [#SAFEBOOT#_NEO0]  24.64,105.54 90 bottom
U$227  [#SAFEBOOT#_ZED0]  47.5,91.57 90 bottom
U$228  [NEO#D9S_DEF_ADDR#_0X4310]  28.45,117.86 90 bottom
U$229  [ZED#F9P_DEF_ADDR#_0X420]  29.84,117.98 90 bottom
U$230  [#EXT_INT_ZED#0]  46.23,72.9 90 bottom
U$231  [ZED#F9P_NEO#D9S_COMBO_BREAKOUT0]  35.69,100.08 0 top
U$232  [V_BKCP0]  46.48,116.59 90 bottom
U$233  SPARKX-LOGO4  [SPARKX-MEDIUM]  52.58,89.92 270 top
U$234  SPARKX-LOGO4  [SPARKX-MEDIUM]  39.24,92.46 90 bottom
U$235  [QWIIC_4MM]  69.6,77.5 0 top
U$236  [#GND#0]  82.3,132.33 270 top
U$237  [#GND#0]  62.74,95 0 top
U$238  [#GND#0]  74.68,72.9 90 bottom
U$239  [#GND#1]  74.68,72.9 270 top
U$240  [#GND#1]  62.74,95 0 bottom
U$241  [#GND#1]  82.3,132.33 90 bottom
U$242  [#5V#0]  62.74,100.08 0 top
U$243  [#5V#6]  62.74,100.08 0 bottom
U$244  [#3V3#0]  79.76,132.33 270 top
U$245  [#3V3#0]  77.22,72.9 90 bottom
U$246  [#3V3#4]  79.76,132.33 90 bottom
U$247  [#3V3#4]  77.22,72.9 270 top
U$248  [##RESET##0]  97.54,72.9 270 top
U$249  [##RESET##1]  97.54,72.9 90 bottom
U$250  [#EXT_INT#0]  95,72.9 270 top
U$251  [#I�C#0]  71.18,124.21 90 bottom
U$252  [#SHLD#0]  64.39,87.38 90 bottom
U$253  [QWIIC_4MM]  69.6,127.66 0 top
U$254  [#3V3#0]  62.74,97.54 0 top
U$255  [#ANT_PWR#0]  97.54,132.33 90 bottom
U$256  [#ANT_PWR#1]  97.54,132.33 270 top
U$257  [#RTK#0]  62.74,102.62 0 top
U$258  [#RTK#1]  62.74,102.62 0 bottom
U$259  [#GEO#0]  62.74,105.16 0 top
U$260  [#GEO#1]  62.74,105.16 0 bottom
U$261  [#TP#0]  62.74,107.7 0 top
U$262  [#TP#1]  62.74,107.7 0 bottom
U$263  [#TX_RDY#0]  62.74,110.24 0 top
U$264  [#TX_RDY#1]  62.74,110.24 0 bottom
U$265  [#RX2#0]  84.84,72.9 270 top
U$266  [#RX2#0]  87.38,132.33 90 bottom
U$267  [#RX2#3]  87.38,132.33 270 top
U$268  [#RX2#3]  84.84,72.9 90 bottom
U$269  [#TX2#0]  87.38,72.9 270 top
U$270  [#TX2#0]  84.84,132.33 90 bottom
U$271  [#TX2#3]  84.84,132.33 270 top
U$272  [#TX2#3]  87.38,72.9 90 bottom
U$273  [#RX1#0]  89.92,72.9 270 top
U$274  [#RX1#0]  92.46,132.33 90 bottom
U$275  [#RX1#2]  92.46,132.33 270 top
U$276  [#RX1#2]  89.92,72.9 90 bottom
U$277  [#TX1#0]  92.46,72.9 270 top
U$278  [#TX1#0]  89.92,132.33 90 bottom
U$279  [#TX1#2]  89.92,132.33 270 top
U$280  [#TX1#2]  92.46,72.9 90 bottom
U$281  [#EXT_INT_NEO#0]  95,132.33 270 top
U$282  [#EXT_INT_NEO#1]  95,132.33 90 bottom
U$283  [#SHLD#0]  64.39,117.86 90 bottom
U$284  [#SDA#0]  77.22,132.33 270 top
U$285  [#SDA#0]  79.76,72.9 90 bottom
U$286  [#SDA#1]  79.76,72.9 270 top
U$287  [#SDA#1]  77.22,132.33 90 bottom
U$288  [#SCL#0]  82.3,72.9 90 bottom
U$289  [#SCL#0]  74.68,132.33 270 top
U$290  [#SCL#1]  74.68,132.33 90 bottom
U$291  [#SCL#1]  82.3,72.9 270 top
U$292  [#TX2#0]  87.38,125.48 90 bottom
U$293  [#RX2#0]  84.84,125.48 90 bottom
U$294  [ZED#F9P0]  84.84,92.46 90 bottom
U$295  [ZED#F9P10]  61.98,78.49 270 top
U$296  [NEO#D9S0]  82.3,92.46 90 bottom
U$297  [NEO#D9S10]  61.98,126.49 270 top
U$298  [COMBO10]  79.76,92.46 90 bottom
U$299  [BREAKOUT11]  77.22,92.46 90 bottom
U$300  [OPEN_JUMPERS_TO0]  87.12,114.68 90 bottom
U$301  [ISOLATE_UART21]  85.09,115.32 90 bottom
U$302  [#PWR#0]  69.6,97.54 0 bottom
U$303  [#3V3#4]  62.74,97.54 0 bottom
U$304  [#SAFEBOOT#_NEO0]  73.41,105.54 90 bottom
U$305  [#SAFEBOOT#_ZED0]  96.27,91.57 90 bottom
U$306  [NEO#D9S_DEF_ADDR#_0X4310]  77.22,117.86 90 bottom
U$307  [ZED#F9P_DEF_ADDR#_0X420]  78.61,117.98 90 bottom
U$308  [#EXT_INT_ZED#0]  95,72.9 90 bottom
U$309  [ZED#F9P_NEO#D9S_COMBO_BREAKOUT0]  84.45,100.08 0 top
U$310  [V_BKCP0]  95.25,116.59 90 bottom
U$311  SPARKX-LOGO4  [SPARKX-MEDIUM]  101.35,89.92 270 top
U$312  SPARKX-LOGO4  [SPARKX-MEDIUM]  88.01,92.46 90 bottom
V_BKCP  TEST-POINT3X5  [PAD.03X.05]  44.96,52.58 0 bottom
V_BKCP1  TEST-POINT3X5  [PAD.03X.05]  93.73,52.58 0 bottom
V_BKCP2  TEST-POINT3X5  [PAD.03X.05]  44.96,116.59 0 bottom
V_BKCP3  TEST-POINT3X5  [PAD.03X.05]  93.73,116.59 0 bottom

## Library data of the parts
!SAFEBOOT_NEO! !SAFEBOOT_NEO!1-!SAFEBOOT_NEO!3 !SAFEBOOT_ZED! !SAFEBOOT_ZED!1-!SAFEBOOT_ZED!3 J5 J9 J10 J15 J17 J18 J25 J27 J28 J35 J37 J38 V_BKCP V_BKCP1-V_BKCP3 = SparkFun-Connectors
BT1-BT4 = SparkFun-Batteries; PROD_ID: BAT-16685
C1 C7 C15 C18 C26 C29 C37 C40 = SparkFun-Capacitors; PROD_ID: CAP-08913
C2-C4 C6 C8 C9 C12 C14 C16 C17 C19 C20 C23 C25 C27 C28 C30 C31 C34 C36 C38 C39 C41 C42 = SparkFun-Capacitors; PROD_ID: CAP-00868
C5 C10 C11 C13 C21 C22 C24 C32 C33 C35 C43 C44 = SparkFun-Capacitors; PROD_ID: CAP-00810
D1 D8 D14 D20 = SparkFun-DiscreteSemi; DIGIKEY_PART: PESD0402-140CT-ND; MOUSE_PART: 650-PESD0402-140; PROD_ID: DIO-15359
D2 D4 D7 D10 D13 D16 D19 D22 = SparkFun-IC-Power; PROD_ID: DIO-14084
D3 D9 D15 D21 = SparkFun-DiscreteSemi; PROD_ID: DIO-10955
D5 D6 D11 D12 D17 D18 D23 D24 = SparkFun-DiscreteSemi; PROD_ID: DIO-11623
E$1-E$4 LOGO1-LOGO8 U$14 U$38 U$79 U$97 U$157 U$175 U$235 U$253 = SparkFun-Aesthetics
E$5 E$6 = SparkFun-Retired
FB1-FB4 = SparkFun-Coils; PROD_ID: NDUC-13805
GEO GEO1-GEO3 I2C I2C1-I2C3 PWR\ PWR\1-PWR\3 RTK RTK1-RTK3 RX2-TX1-RX2-TX4 SHLD_NEO SHLD_NEO1-SHLD_NEO3 SHLD_ZED SHLD_ZED1-SHLD_ZED3 TP TP1-TP3 TX2-RX1-TX2-RX4 = SparkFun-Jumpers
J1 J14 J24 J34 = SparkFun-RF; PROD_ID: CONN-08289
J2 J4 J11 J12 J21 J22 J31 J32 = SparkFun-Connectors; PROD_ID: CONN-13694
J3 J6 J13 J16 J23 J26 J33 J36 = SparkFun-Connectors; PROD_ID: CONN-14122
J7 J8 J19 J20 J29 J30 J39 J40 = SparkFun-Connectors; PROD_ID: CONN-08437
JP1-JP25 JP31 JP41 JP61 JP71 JP81 JP91 JP101 = SparkFun
L1-L4 = SparkFun-Coils
LED1 LED5 LED9 LED13 = SparkFun-LED; PROD_ID: DIO-00819
LED2-LED4 LED6-LED8 LED10-LED12 LED14-LED16 = SparkFun-LED; PROD_ID: DIO-08575
R1 R27-R29 R41 R61-R63 R75 R95-R97 R109 R129-R131 = SparkFun-Resistors; PROD_ID: RES-07856
R2-R6 R11 R17-R26 R30 R31 R35 R36 R39 R40 R47 R48 R51-R60 R64 R65 R69 R70 R73 R74 R81 R82 R85-R94 R98 R99 R103 R104 R107 R108 R115 R116 R119-R128 R132 R133 = SparkFun-Resistors; PROD_ID: RES-08270
R7 R8 R37 R38 R71 R72 R105 R106 = SparkFun-Resistors; PROD_ID: RES-08272
R9 R10 R15 R16 R42 R43 R49 R50 R76 R77 R83 R84 R110 R111 R117 R118 = SparkFun-Resistors; PROD_ID: RES-09334
R12 R13 R33 R34 R45 R46 R67 R68 R79 R80 R101 R102 R113 R114 R135 R136 = SparkFun-Resistors; PROD_ID: RES-12083
R14 R44 R78 R112 = SparkFun-Resistors; PROD_ID: RES-12581
R32 R66 R100 R134 = SparkFun-Resistors; PROD_ID: RES-07851
U1 U6 U10 U14 = SparkFun-GPS; PROD_ID: IC-16579
U2 U5 U9 U13 = SparkFun-IC-Power; PROD_ID: VREG-12457
U3 U7 U11 U15 = SparkFun-RF; DIGI-KEY_PART_NUMBER_1: 1173-1094-2-ND; MANUFACTURER_PART_NUMBER: PD0922J5050S2HF; PROD_ID: IC-16658
U4 U8 U12 U16 = SparkFun-GPS; PROD_ID: IC-14209
U$1-U$13 U$15-U$37 U$39-U$76 U$80-U$96 U$98-U$154 U$158-U$174 U$176-U$232 U$236-U$252 U$254-U$310 = output
U$77 U$78 U$155 U$156 U$233 U$234 U$311 U$312 = SparkX